# EAGLE board Half_Adder_Circuit (EAGLE 9.7.0)

Size 150.56 x 56.8 mm. Coordinates in mm from the lower left corner, seen from the top.
Outline: 0,0 150.56,0 150.56,56.8 0,56.8 0,0
Copper layers (1*16): Top 0.035mm / dielectric 1.5mm / Bottom 0.035mm
Design rules "default": minimum track width 6mil, minimum drill 0.35mm, track to track 6mil, track to pad 6mil, pad to pad 6mil, via to via 6mil, smd to smd 6mil, copper to edge 40mil, drill to drill 6mil, minimum pad ring 10mil, minimum via ring 8mil, stop-mask expansion 4mil, vias tented up to drill 0mil, thermal gap 10mil

## Footprints (pad centres in the part's own frame; a part is rotated, then mirrored left to right if it is on the bottom)
LEDRD254W60D565H860B_G = drill 0.981 pad 1.581: 1 -1.27,0; 2 1.27,0
LEDRD254W60D565H860B = drill 0.981 pad 1.581: 1 -1.27,0; 2 1.27,0
BATTERY-GENERIC = drill 1.118 pad 3.15 octagon: + 2.54,0; - -2.54,0
RESAD1016W63L850D250B = drill 0.83 pad 1.43: 1 -5.08,0; 2 5.08,0
78B04ST = drill 0.8: 1 -3.81,-3.81; 2 -1.27,-3.81; 3 1.27,-3.81; 4 3.81,-3.81; 5 3.81,3.81; 6 1.27,3.81; 7 -1.27,3.81; 8 -3.81,3.81
DIP762W53P254L1969H508Q14B = drill 0.743 pad 1.343: 1 -3.81,7.62; 2 -3.81,5.08; 3 -3.81,2.54; 4 -3.81,0; 5 -3.81,-2.54; 6 -3.81,-5.08; 7 -3.81,-7.62; 8 3.81,-7.62; 9 3.81,-5.08; 10 3.81,-2.54; 11 3.81,0; 12 3.81,2.54; 13 3.81,5.08; 14 3.81,7.62

## Placement (x,y rotation side)
D2  GREEN  [LEDRD254W60D565H860B_G]  142.96,16.59 180 top
D3  RED  [LEDRD254W60D565H860B]  135.34,16.59 180 top
PPOWER_SUPPLY  BATTERYGENERIC  [BATTERY-GENERIC]  8.26,48.54 180 top
R1  1k  [RESAD1016W63L850D250B]  136.61,8.97 90 top
R2  1k  [RESAD1016W63L850D250B]  144.23,8.97 90 top
SWSWITCH  SPST-478B04ST  [78B04ST]  15.96,10.24 0 top
UIC1  74HC00_PDIP  [DIP762W53P254L1969H508Q14B]  65.49,10.24 90 top
UIC2  74HC00_PDIP  [DIP762W53P254L1969H508Q14B]  95.97,10.24 90 top

## Library data of the parts
D2 = Tinkercad; CATEGORY: Opto-Electronic; SUB-CATEGORY: LED; VALUE: LED_GREEN
D3 = Tinkercad; CATEGORY: Opto-Electronic; SUB-CATEGORY: LED; VALUE: LED_RED
PPOWER_SUPPLY R1 R2 SWSWITCH UIC1 UIC2 = Tinkercad

## Nets
D2_A: D2.1 R2.2
D3_A: D3.1 R1.2
PPOWER_SUPPLY+: PPOWER_SUPPLY.+ SWSWITCH.7 SWSWITCH.8 UIC1.14 UIC2.14
PPOWER_SUPPLY-: D2.2 D3.2 PPOWER_SUPPLY.- UIC1.7 UIC2.7
UIC1_1A: SWSWITCH.1 UIC1.1 UIC1.5
UIC1_1Y: UIC1.3 UIC1.4 UIC1.13 UIC2.1 UIC2.2
UIC1_2Y: UIC1.6 UIC1.9
UIC1_3Y: R1.1 UIC1.8
UIC1_4A: SWSWITCH.2 UIC1.2 UIC1.12
UIC1_4Y: UIC1.10 UIC1.11
UIC2_1Y: R2.1 UIC2.3

## Tracks (layer width: path | path; a pad name or v marks a point on that pad's centre or on a via)
D2_A  (1 unrouted)
D3_A  (1 unrouted)
PPOWER_SUPPLY+  (4 unrouted)
PPOWER_SUPPLY-  (4 unrouted)
UIC1_1A  (2 unrouted)
UIC1_1Y  (4 unrouted)
UIC1_2Y  (1 unrouted)
UIC1_3Y  (1 unrouted)
UIC1_4A  (2 unrouted)
UIC1_4Y  (1 unrouted)
UIC2_1Y  (1 unrouted)